# Altium PCB Weather Station v3.PcbDoc
Units mm, origin at the board's own origin, x right, y up, seen from the top; angles counter-clockwise.
Board outline 135.7 x 101 mm, 2 copper layers (Top Layer, Bottom Layer); 49 components, 44 nets, 198 pads, 34 vias.
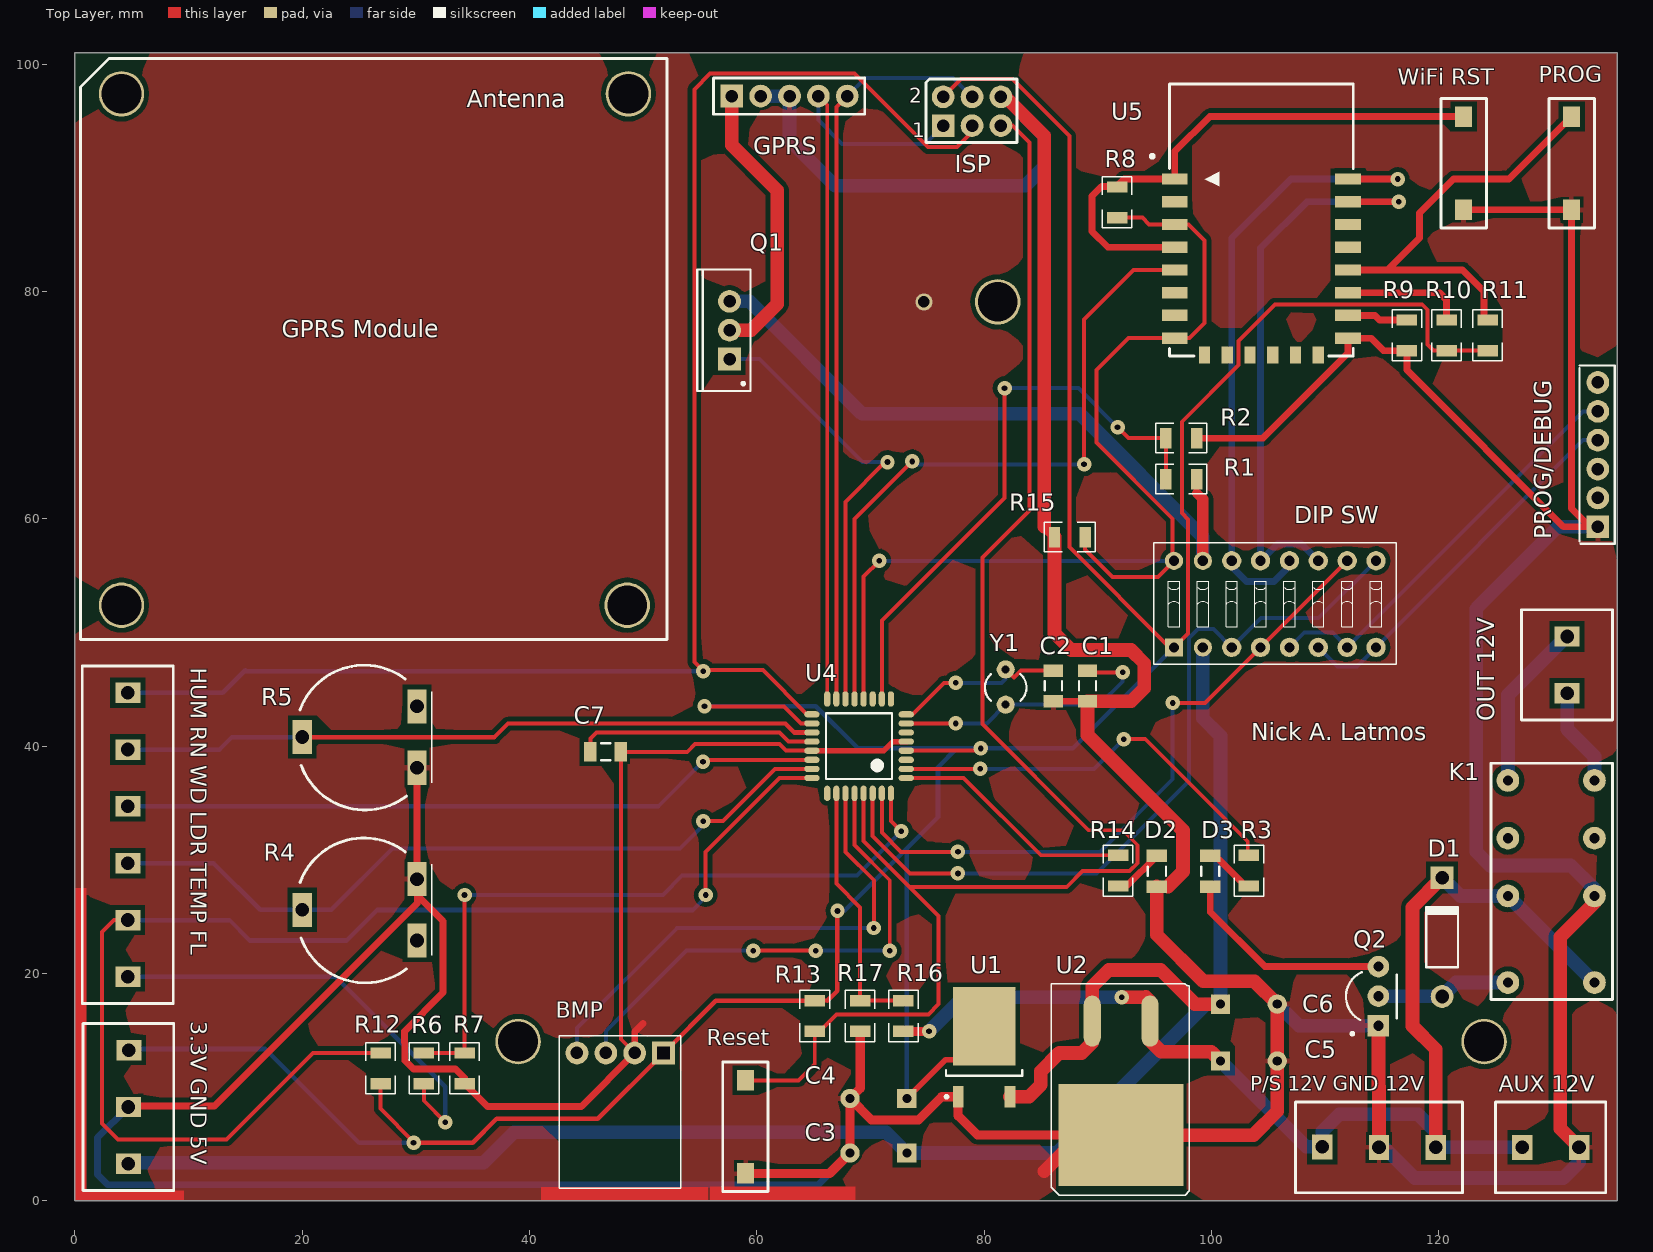
[diagram p0: Top Layer view]
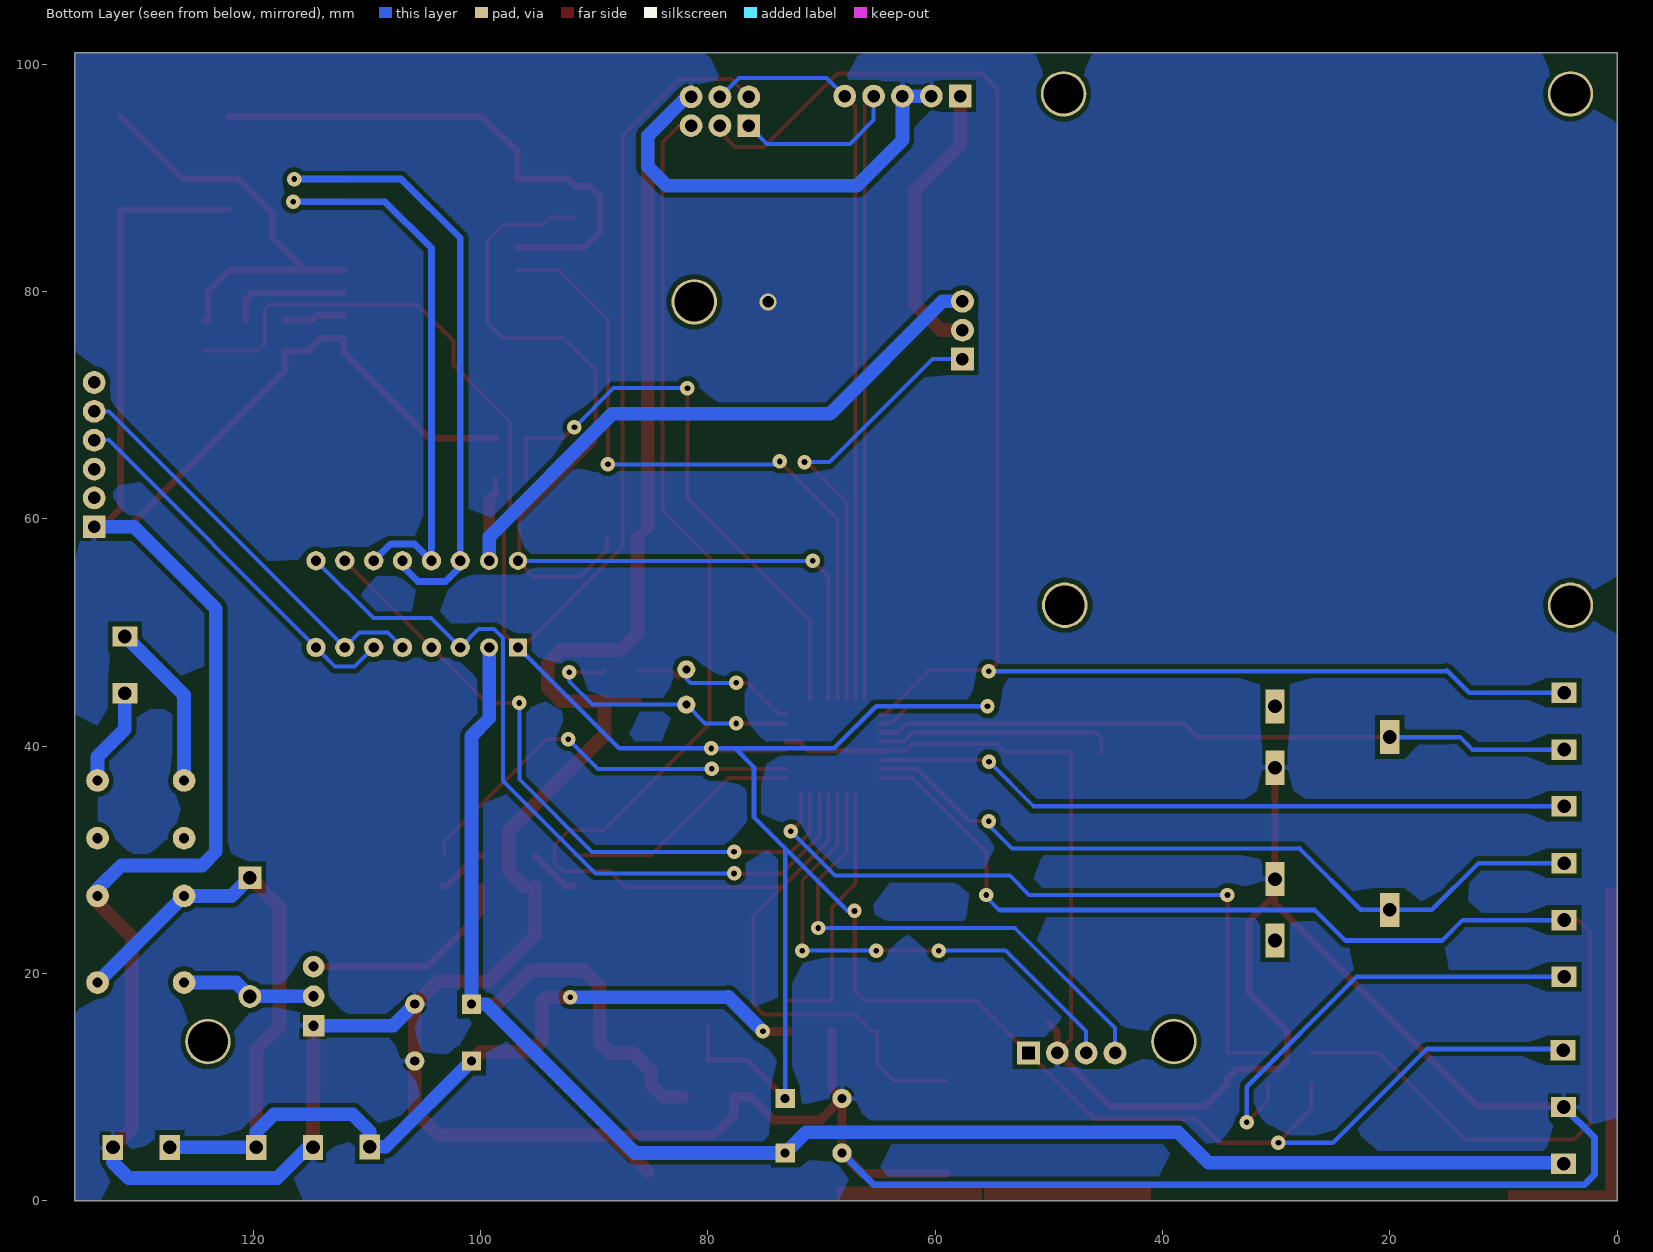
[diagram p1: Bottom Layer view, seen from below]

## Layer stack, top to bottom
Top Solder: solder mask 0.0102, Solder Resist, Dk 3.5
Top Layer: signal copper 0.0356
Dielectric 1: dielectric 0.32, FR-4, Dk 4.8
Bottom Layer: signal copper 0.0356
Bottom Solder: solder mask 0.0102, Solder Resist, Dk 3.5

## Board outline
0,0 0,101 135.7,101 135.7,0 0,0

## Design rules (kind name [scope] priority, off if disabled: settings)
Clearance "Polygon Clearance" [inPolygon] p1: gap=0.43
Clearance "HV to other nets Clearance" [InNetClass('HV')] p2: gap=0.254
Clearance "HV to HV Clearance" [InNetClass('HV') vs InNetClass('HV')] p3: gap=0.4
Clearance [All] p4: gap=0.254
HoleSize [All] p1: absolutevalues=TRUE maxlimit=4 minlimit=0.3 maxpercent=80.000 minpercent=20.000
HoleToHoleClearance [All] p1: gap=0.31 allowstackedmicrovias=TRUE
MinimumSolderMaskSliver [All] p1: minsoldermaskwidth=0.32
PolygonConnect [All] p1: connectstyle=Relief reliefconductorwidth=0.4 reliefentries=4 polygonreliefangle="90 Angle" airgapwidth=0.254
RoutingVias [All] p1: holewidth=0.5 width=1.27 viastyle="Through Hole" minholewidth=0.5 minwidth=1.27 maxholewidth=0.7 maxwidth=1.27
RoutingVias "HV vias" [InNetClass('HV')] p2: holewidth=0.7 width=1.4 viastyle="Through Hole" minholewidth=0.7 minwidth=1.4 maxholewidth=0.9 maxwidth=1.4
SMDNeckDown [All] p1: percent=85.000
SilkToSolderMaskClearance [IsPad] p1: minsilkscreentomaskgap=0.17 clearancetoexposedcopper=FALSE
SolderMaskExpansion [All] p1: expansion=0.102
UnpouredPolygon [All] p1: allowunpoured=FALSE
Width "GND Width" [InNet('GND')] p1: maxlimit=1.2 minlimit=0.35 preferedwidth=0.6
Width "Sensors Width" [InNetClass('Sensors')] p2: maxlimit=0.4 minlimit=0.254 preferedwidth=0.35
Width "Processor Width" [InNetClass('Processor')] p3: maxlimit=0.4 minlimit=0.254 preferedwidth=0.35
Width "LV Width" [InNetClass('LV')] p4: maxlimit=0.7 minlimit=0.4 preferedwidth=0.6
Width "HV Width" [InNetClass('HV')] p5: maxlimit=1.4 minlimit=1 preferedwidth=1.2
Width [All] p6: maxlimit=0.35 minlimit=0.254 preferedwidth=0.35
25 further rules are at their usual default settings.

## Classes and differential pairs
net class Sensors: 3.3V DHT22_DATA DS18B20_DQ FLOW_METER GND LDR_PIN NetP1_6 RAIN_PIN SCL0 SDA0 WIND_SENSOR
net class Processor: 3.3V BATTERY_VOLTAGE CONNECTION_STATUS_LED DHT22_DATA DS18B20_DQ FLOW_METER GND GPRS_CONTROL_PIN GPRS_STATUS LDR_PIN MCU_RX0 MCU_RX1 MCU_TX0 MCU_TX1 NetC1_2 NetC2_1 NetC7_2 NetISP_5 RAIN_PIN ROUTER SCL0 SDA0 VALVE_CONTROL_PIN WIFI_ENABLE WIND_SENSOR
net class LV: 3.3V CONNECTION_STATUS_LED GND GPRS_CONTROL_PIN GPRS_STATUS NetD2_1 NetD3_1 NetD3_2 NetR8_1 NetR9_1 NetR10_1 NetR11_1 ROUTER VALVE_CONTROL_PIN WIFI_ENABLE WIFI_RX WIFI_TX
net class HV: 5V 12V_BAT GND GPRS_ENABLE MOSFET_DRAIN NetD1_1 NetK1_8 NetK1_9

## Components (designator, comment, footprint, x,y, rotation, side; value= is the part's Value field where it differs from the comment)
"3.3V GND 5V" "Clamp x3" "Connector x3 clamps" 8.7,0.9 r90 top (schematic designator "Low Voltage")
"AUX 12V" "AUX 12V" "Connector (Clamp?)" 125,0.7 r0 top
BMP "BMP180" BMP180 53.6,14 r180 top (schematic designator BMP180)
C1 "Cap Semi" C1206 89.1,45.3 r90 top
C2 "Cap Semi" C1206 86.1,45.3 r270 top
C3 "Cap2" CAPR5-4X5 70.7,4.2 r180 top
C4 "Cap2" CAPR5-4X5 70.7,9 r180 top
C5 "Cap2" CAPR5-4X5 103.3,12.3 r0 top
C6 "Cap2" CAPR5-4X5 103.3,17.3 r0 top
C7 "Cap Semi" C1206 46.7,39.5 r180 top
D1 "Diode 1N4004" DO-41 120.3,23.2 r90 top
D2 "LED0" INDC3216 95.2,29 r270 top
D3 "LED0" INDC3216 99.9,29 r270 top
"DIP SW" "418117170908" 418117170908 105.6,52.5 r0 top
GPRS "Header 5" HDR1X5 57.8,97.2 r0 top (schematic designator "SIM Pinout")
"GPRS Module" "SIM900" SIM900 2.1,50.4 r0 top (schematic designator U3)
"HUM RN WD LDR TEMP FL" "Clamp" "Connector Clamp 6" 4.6,30.7 r270 top (schematic designator P1)
ISP "Header 3X2" HDR2X3 76.4,94.6 r0 top
K1 "Relay-DPDT" "Sanyou Relay" 134.9,18.2 r90 top
"OUT 12V" "Homemade Connector" "Connector (Clamp?)" 127.3,52 r270 top
"P/S 12V GND 12V" "Clamp x3" "Connector x3 clamps" 122.1,8.7 r180 top (schematic designator P2)
PROG "SW-PB" "SMD push button 10x4" 131.7,96.3 r180 top (schematic designator S2)
PROG/DEBUG "Header 6" HDR1X6 134,59.3 r90 top (schematic designator FTDI)
Q1 "PMOS-2" TO-220AB 57.6,76.6 r90 top
Q2 "BC639-16ZL1G" ONSC-TO-92-3-29-11_AM_BL 114.7,18 r90 top
R1 "smd resistor 4x2mm" "smd resistor 4x2mm" 99.4,62.4 r90 top
R2 "smd resistor 4x2mm" "smd resistor 4x2mm" 99.4,66 r90 top
R3 "smd resistor 4x2mm" "smd resistor 4x2mm" 102.2,27 r0 top
R4 "RPot" "potentiometer (Piher)" 31,21.6 r90 top
R5 "RPot" "potentiometer (Piher)" 31,36.8 r90 top
R6 "smd resistor 4x2mm" "smd resistor 4x2mm" 29.6,9.6 r0 top
R7 "smd resistor 4x2mm" "smd resistor 4x2mm" 33.2,9.6 r0 top
R8 "smd resistor" "smd resistor 4x2mm" 92.8,89.9 r180 top
R9 "smd resistor 4x2mm" "smd resistor 4x2mm" 118.3,78.2 r180 top
R10 "smd resistor 4x2mm" "smd resistor 4x2mm" 121.8,78.2 r180 top
R11 "smd resistor 4x2mm" "smd resistor 4x2mm" 125.4,78.2 r180 top
R12 "smd resistor 4x2mm" "smd resistor 4x2mm" 28,13.7 r180 top
R13 "smd resistor 4x2mm" "smd resistor 4x2mm" 64,14.2 r0 top
R14 "smd resistor 4x2mm" "smd resistor 4x2mm" 90.7,27 r0 top
R15 "smd resistor 4x2mm" "smd resistor 4x2mm" 89.6,57.3 r90 top
R16 "smd resistor 4x2mm" "smd resistor 4x2mm" 71.8,14.2 r0 top
R17 "smd resistor 4x2mm" "smd resistor 4x2mm" 70.2,18.3 r180 top
Reset "SW-PB" "SMD push button 10x4" 59,11.5 r180 top (schematic designator S3)
U1 "LM1117DT-3.3" TD03B_N 80,13.5 r90 top
U2 "L7805" D2PAK 94.6,15.8 r180 top
U4 "ATmega328P-AU" 32A_L 69,40 r180 top
U5 "ESP_12_E" ESP_12_E 96.4,89.9 r0 top
"WiFi RST" "SW-PB" "SMD push button 10x4" 122.2,86.3 r0 top (schematic designator S1)
Y1 "XTAL" R38 81.9,45.2 r180 top

## Footprints (in the part's own frame and the unit in brackets; to place one, negate y for a bottom-side part, rotate by r counter-clockwise, add the part's x,y. Pads: shape width x height; smd on the part's side, far side on the other; paste and mask are expansions set on the pad)
32A_L [mm] "Thin QFP, 32-Leads, Body 7x7mm, Pitch 0.8mm, IPC High Density"
  oval 1.35x0.546 smd mask+0.15: 1(-4.15,2.8) 2(-4.15,2) 3(-4.15,1.2) 4(-4.15,0.4) 5(-4.15,-0.4) 6(-4.15,-1.2) 7(-4.15,-2) 8(-4.15,-2.8) 17(4.15,-2.8) 18(4.15,-2) 19(4.15,-1.2) 20(4.15,-0.4) 21(4.15,0.4) 22(4.15,1.2) 23(4.15,2) 24(4.15,2.8)
  oval 0.546x1.35 smd mask+0.15: 9(-2.8,-4.15) 10(-2,-4.15) 11(-1.2,-4.15) 12(-0.4,-4.15) 13(0.4,-4.15) 14(1.2,-4.15) 15(2,-4.15) 16(2.8,-4.15) 25(2.8,4.15) 26(2,4.15) 27(1.2,4.15) 28(0.4,4.15) 29(-0.4,4.15) 30(-1.2,4.15) 31(-2,4.15) 32(-2.8,4.15)
  silkscreen extent -2.9,-2.9 2.9,2.9, body extent -3.5,-3.5 3.5,3.5, height 1.2
418117170908 [mm] "08p, 2.54mm Pitch, Horizontal, Box Type, THT, flat Actuator, red, without Tape, Tube"
  rect 1.6x1.6 hole 0.9: 1(-8.89,-3.81)
  round 1.6 hole 0.9: 2(-6.35,-3.81) 15(-6.35,3.81) 16(-8.89,3.81)
  round 1.7 hole 0.9: 3(-3.81,-3.81) 4(-1.27,-3.81) 5(1.27,-3.81) 6(3.81,-3.81) 7(6.35,-3.81) 8(8.89,-3.81) 9(8.89,3.81) 10(6.35,3.81) 11(3.81,3.81) 12(1.27,3.81) 13(-1.27,3.81) 14(-3.81,3.81)
  silkscreen extent -10.66,-5.3 10.66,5.4, body extent -10.66,-4.8 10.66,4.8, height 5.2
BMP180 [mm]
  rect 2x2 hole 1.1 square: 1(1.8,1)
  round 2 hole 1.1: 2(4.34,1) 3(6.88,1) 4(9.42,1)
  silkscreen extent 0.3,-0.5 11,12.9
C1206 [mm] "Chip Capacitor, Body 3.2x1.6mm, IPC High Density"
  rect 1.1x1.7 smd: 1(-1.35,0) 2(1.35,0)
  silkscreen extent -0.4,-0.75 0.4,0.75, body extent -1.7,-0.9 1.7,0.9, height 1.3
CAPR5-4X5 [mm] "Capacitor; 2 Leads"
  rect 1.7x1.7 hole 0.8: 1(-2.5,0)
  round 1.7 hole 0.8: 2(2.5,0)
"Connector (Clamp?)" [mm]
  rect 1.8x2.2 hole 1.2: 1(2.35,4) 2(7.35,4)
  silkscreen extent 0,0 9.7,8
"Connector Clamp 6" [mm]
  rect 1.8x2.2 hole 1.2: 1(-14,0.05) 2(-9,0.05) 3(-4,0.05) 4(1,0.05) 5(6,0.05) 6(11,0.05)
  silkscreen extent -16.35,-3.95 13.35,4.05
"Connector x3 clamps" [mm]
  rect 1.8x2.2 hole 1.2: 1(2.35,4) 2(7.35,4) 3(12.35,3.95)
  silkscreen extent 0,0 14.7,8
D2PAK [mm]
  oval 1.5x4.5 smd: 1(0,0) 3(5.08,0)
  rect 11x9 smd: 2(2.54,10.025)
  silkscreen extent -3.47,-3.3 8.7,15.3, body extent -2.62,0.05 7.59,13.54, height 3.81
DO-41 [mm] "Diode, Axial; Body 5.2 x 2.7 mm (LxDia. max), Lead Dia. 0.86 mm (max)"
  round 2 hole 1.2: 1(-5.23,0)
  rect 2x2 hole 1.2: 2(5.23,0)
  silkscreen extent -2.65,-1.4 2.75,1.4
ESP_12_E [mm] "ESP-12 Wi-Fi Module by AI-Thinker"
  rect 2.25x1 smd: 1(0.375,0) 2(0.375,-2) 3(0.375,-4) 4(0.375,-6) 5(0.375,-8) 6(0.375,-10) 7(0.375,-12) 8(0.375,-14) 15(15.625,-14) 16(15.625,-12) 17(15.625,-10) 18(15.625,-8) 19(15.625,-6) 20(15.625,-4) 21(15.625,-2) 22(15.625,0)
  rect 1x1.5 smd: 9(3,-15.5) 10(5,-15.5) 11(7,-15.5) 12(9,-15.5) 13(11,-15.5) 14(13,-15.5)
  silkscreen extent -1.75,-15.57 16.08,8.37, body extent 0,-15.49 16,8.51, height 2.75
HDR1X5 [mm] "Connector; Header; 5 Position"
  rect 2x2 hole 1.1: 1(0,0)
  round 2 hole 1.1: 2(2.54,0) 3(5.08,0) 4(7.62,0) 5(10.16,0)
HDR1X6 [mm] "Connector; Header; 6 Position"
  rect 2x2 hole 1.1: 1(0,0)
  round 2 hole 1.1: 2(2.54,0) 3(5.08,0) 4(7.62,0) 5(10.16,0) 6(12.7,0)
  silkscreen extent -1.5,-1.5 14.2,1.6
HDR2X3 [mm] "Connector; Header; 3x2 Position"
  rect 2x2 hole 1.1: 1(0,0)
  round 2 hole 1.1: 2(0,2.54) 3(2.54,0) 4(2.54,2.54) 5(5.08,0) 6(5.08,2.54)
INDC3216 [mm] "Chip Inductor, Body 3.2x1.6mm, IPC High Density"
  rect 1.1x1.8 smd: 1(-1.35,0) 2(1.35,0)
  silkscreen extent -0.4,-0.8 0.4,0.8, body extent -1.7,-0.9 1.7,0.9, height 0.55
ONSC-TO-92-3-29-11_AM_BL [mm] "TO, 3-Leads, Body Dia 4.7mm, Pitch 2.6mm"
  rect 1.9x1.9 hole 0.9: 1(-2.6,0)
  round 1.9 hole 0.9: 2(0,0) 3(2.6,0)
  silkscreen extent -3.42,-1.6 2.12,2.85, body extent -2.84,-1.34 2.84,2.36, height 8.92
"potentiometer (Piher)" [mm]
  rect 3x1.7 hole 1.2: 1(1.3,0.9) 2(6.7,0.9) 3(4,11)
  silkscreen extent -2.42,-0.4 10.32,11.19
R38 [mm] "Crystal, Thru-Hole; 2 Leads; Body 3.1 x 8.2 mm (Dia.xH)"
  round 1.6 hole 0.7: 1(0,1.55) 2(0,-1.55)
  silkscreen extent -1.83,-1.14 1.83,1.2
"Sanyou Relay" [mm] "Sanyou Relay"
  round 2 hole 0.9: 1(1,8.81) 4(8.62,8.81) 6(13.7,8.81) 8(18.78,8.81) 9(18.78,1.19) 11(13.7,1.19) 13(8.62,1.19) 16(1,1.19)
  silkscreen extent -0.5,-0.4 20.3,10.3
SIM900 [mm]
  round 4 hole 3.5: 6(2,47) 7(46.6,47) 8(46.5,2) 9(2,2)
  silkscreen extent -1.6,-1 50,50.1
"SMD push button 10x4" [mm]
  rect 1.5x1.8 smd: 1(0,0.9) 2(0,9.1)
  silkscreen extent -2,-0.7 2,10.7
"smd resistor 4x2mm" [mm]
  rect 1.8x1 smd: 1(1.1,0.7) 2(1.1,3.4)
  silkscreen extent -0.2,-0.2 2.4,4.3
TD03B_N [mm] "D-PAK, 4-Leads, Body 6.1x6.6mm, Pitch 2.29mm, Lead Span 9.7mm, IPC Medium Density"
  rect 1.9x0.95 smd: 1(-4.35,2.28) 3(-4.35,-2.28)
  rect 6.9x5.5 smd: 4(1.85,0)
  silkscreen extent -4.47,-3.35 -2,3.43, body extent -2.5,-3.35 3.7,3.35, height 2.38
TO-220AB [mm] "TO, Thru-Hole, Vertical, Heatsink Mounted; 3 In-Line Leads; Pitch 2.54 mm"
  rect 2x2 hole 1.1: 1(-2.54,0)
  round 2 hole 1.1: 2(0,0) 3(2.54,0)
  silkscreen extent -5.35,-1.85 5.35,2.85, body extent -5.4,-1.9 5.4,2.9, height 19.3

## Part data
"AUX 12V" "OUT 12V": library part "Header 2", "Klema"
C1 C2 C7: "Capacitor (Semiconductor SIM Model)"
C3 C4 C5 C6: "Capacitor"
D1: "1 Amp General Purpose Rectifier"
D2 D3: "SMD led"
"DIP SW": "2.54 mm Compact THT Dip Switch with Flat Actuator WS-DITV"
GPRS: "Header, 5-Pin"
"HUM RN WD LDR TEMP FL": library part "Header 6", "Header, 6-Pin"
ISP: "Header, 3-Pin, Dual row"
K1: "Dual-Pole Dual-Throw Relay"
PROG Reset "WiFi RST": "Switch"
PROG/DEBUG: "Header, 6-Pin"
Q1: "P-Channel Power MOSFET"
Q2: "High Current Transistor, NPN Silicon, 3-Pin TO-92, Pb-Free, Ammo Box"
R1 R2 R3 R6 R7 R8 R9 R10 R11 R12 R13 R14 R15 R16 R17: library part Res3
R4 R5: "Potentiometer"
U1: "800mA Low-Dropout Linear Regulator, 3-pin TO-252"
U2: library part L7805-D2PAK, "LINEAR REGULATOR 5.0V"
U4: "8-bit AVR Microcontroller, 32KB Flash, 1KB EEPROM, 2KB SRAM, 32-pin TQFP, Industrial Grade (-40°C to 85°C)"
U5: "ESP-12 Wi-Fi Module by AI-Thinker"
Y1: "Crystal Oscillator"

## Free pads (board coordinates)
  round 4 hole 3.5: 0(39,14) 0(81.2,79.1) 0(124,14)

## Via types
v1: diameter 1.27, hole 0.5, Top Layer to Bottom Layer, 33 vias
v2: diameter 1.5, hole 1, Top Layer to Bottom Layer, 1 vias

## Nets (pads, with @x,y where several pads share a name; then routed paths per layer and width w, separated by ;. In a path a pad name is that pad's centre, name@x,y a point inside that pad or via, vN(x,y) a via of type N, cw(c..) or ccw(c..) an arc to the next point about the centre after c; other vN are vias at no path point)
3.3V: "3.3V GND 5V.3" "DIP SW.1" BMP.1 C4.1 ISP.2 R10.2 R11.2 R12.2 R13.2 U1.4 U4.4 U4.18 | length 323.3
  Top Layer w0.35: R12.2 26.9,8.1 v1@29.9,5.1 ; v1(55.4,43.5) 62.4,43.5 63.9,42 U4.18 ; R13.2 66.216,17.6 ; U4.4 79.5,39.6 v1(79.7,39.8) ; ISP.2 77.96,98.7 82.481,98.7 87.5,93.681 87.5,57.512 96.322,48.69 96.71,48.69 97.941,49.921 97.941,59.959 97.4,60.5 97.4,68.543 102.4,73.543 102.4,75.66 105.586,78.846 118.554,78.846 119,78.4 119,75.338 119.538,74.8 R10.2 R11.2 ; U1.4@80,12.4 U1.4
  Top Layer w0.4: v1@29.9,5.1 35,5.1 37.1,7.2 46,7.2 BMP.1 56.4,17.6 R13.2 ; 66.216,17.6 67.1,18.484 v1(67.1,25.5)
  Top Layer w0.5: C4.1 76.6,12.4 U1.4@80,12.4
  Bottom Layer w0.35: v1(67.1,25.5) v1@67.708,25.5 ; 73.2,30.981 75.946,33.727
  Bottom Layer w0.4: 4.75,13.25 4.85,13.35 16.75,13.35 25,5.1 v1(29.8,5.1) ; v1(55.4,43.5) 65.2,43.5 68.9,39.8 77.6,39.8 ; v1@67.708,25.5 75.944,33.736 ; C4.1 73.2,30.981 ; 75.946,33.727 75.946,38.146 77.6,39.8 ; 96.71,48.69 87.82,39.8 v1(79.7,39.8) 77.6,39.8
5V: "3.3V GND 5V.1" "DIP SW.2" C3.1 C6.1 U1.3 U2.3 | length 163.4
  Top Layer w1.2: U1.3 83.95,9.15 85,10.2 85,11.4 86.6,13 88.6,13 89.52,13.92 89.52,18.857 90.963,20.3 95.55,20.3 98.55,17.3 C6.1
  Bottom Layer w1.2: 4.7,3.25 4.8,3.35 35.957,3.35 38.632,6.025 71.375,6.025 C3.1 86.415,4.2 99.515,17.3 C6.1 100.8,40.9 99.25,42.45 99.25,48.69
12V_BAT: "AUX 12V.1" "P/S 12V GND 12V.1" "P/S 12V GND 12V.3" C5.1 D1.2 K1.4 K1.16 R16.1 U2.1 | length 110.1
  Top Layer w0.8: R16.1 v1(75.157,14.9)
  Top Layer w1.2: v1(92.1,17.9) 94.182,17.9 94.219,17.937 94.6,17.556 94.6,14.1 95.6,13.1 100,13.1 C5.1 ; 119.75,4.7 119.75,13.324 117.7,15.374 117.7,25.83 D1.2
  Bottom Layer w1.2: v1(75.157,14.9) 78.194,17.937 78.231,17.9 v1(92.1,17.9) ; C5.1 108.35,4.75 109.75,4.75 109.75,6.099 111.251,7.6 118.209,7.6 119.75,6.059 119.75,4.7 121.258,4.7 127.35,4.7 ; D1.2 121.91,26.82 K1.4 K1.16
BATTERY_VOLTAGE: R16.2 R17.1 U4.26 | length 22.9
  Top Layer w0.35: U4.26 67,27.9 69.086,25.814 69.086,17.6 R17.1 70.991,17.6 ; 70.991,17.6 R16.2
CONNECTION_STATUS_LED: R14.2 U4.1 | length 21.5
  Top Layer w0.35: U4.1 78.2,37.2 85,30.4 R14.2
DHT22_DATA: "HUM RN WD LDR TEMP FL.1" ISP.3 U4.17 | length 143.1
  Top Layer w0.35: U4.17 64.438,42.8 60.549,46.689 55.389,46.689 v1(55.3,46.6) 54.5,47.4 54.5,97.8 55.9,99.2 68.6,99.2 75.085,92.715 77.615,92.715 78.94,94.04 ISP.3
  Bottom Layer w0.35: 14.989,46.689 15.077,46.6
  Bottom Layer w0.4: 4.65,44.7 13,44.7 14.989,46.689 ; 15.077,46.6 v1(55.3,46.6)
DS18B20_DQ: "HUM RN WD LDR TEMP FL.5" R12.1 U4.24 | length 117
  Top Layer w0.35: 4.65,24.7 3.45,24.7 2.4,23.65 2.4,6.8 3.804,5.396 13.356,5.396 20.96,13 R12.1 ; v1(55.5,26.9) 55.5,30.7 62,37.2 U4.24
  Bottom Layer w0.35: 54.38,25.583 55.5,26.703 v1(55.5,26.9)
  Bottom Layer w0.4: 4.65,24.7 13.6,24.7 15.4,22.9 23.909,22.9 26.592,25.583 54.38,25.583
FLOW_METER: R6.2 R7.2 U4.32 | length 62
  Top Layer w0.35: R6.2 R7.2@34.288,13 ; v1(34.288,26.903) R7.2@34.288,13 ; R7.2 R7.2@34.288,13 ; U4.32 71.8,33.4 v1(72.7,32.5)
  Bottom Layer w0.35: v1(34.288,26.903) 51.738,26.903 53.435,28.6 68.8,28.6 v1(72.7,32.5)
FTDI_RX: "DIP SW.5" "DIP SW.7" PROG/DEBUG.5 | length 36.8
  Bottom Layer w0.35: 106.87,48.69 108.172,49.992 110.648,49.992 111.95,48.69 132.72,69.46 PROG/DEBUG.5
FTDI_TX: "DIP SW.6" "DIP SW.8" PROG/DEBUG.4 | length 33.5
  Bottom Layer w0.35: 109.41,48.69 111.1,47 112.8,47 114.49,48.69 132.72,66.92 PROG/DEBUG.4
GND: "3.3V GND 5V.2" "AUX 12V.2" "P/S 12V GND 12V.2" "WiFi RST.1" BMP.2 C1.1 C2.2 C3.2 C4.2 C5.2 C6.2 C7.1 D2.2 GPRS.2 GPRS.3 ISP.6 K1.13 PROG.2 PROG/DEBUG.1 Q2.1 R2.1 R4.2 R5.1 R7.1 R9.2 R15.2 R17.2 Reset.2 U1.1 U2.2 U4.5 U4.21 U5.15 | length 642.5
  Top Layer w0.35: BMP.2 48.05,14.21 C7.1 53.88,39.5 54.567,40.187 61.997,40.187 62.571,39.613 U4.21@64.437,39.613
  Top Layer w0.467: U4.21@64.437,39.613 64.45,39.6 U4.21 71.182,39.6 71.982,40.4 U4.5
  Top Layer w0.6: 4.7,8.25 4.8,8.35 12.283,8.35 30.1,26.167 30.125,26.167 R4.2@30.117,26.883 ; R5.1 R4.2 30.1,26.9 R4.2@30.117,26.883 ; 50,15.6 49.26,14.86 BMP.2 44.56,8.3 36.3,8.3 R7.1 34.3,10.8 33.5,11.6 29.78,11.6 29.029,12.351 29.029,13.915 29,13.944 29,14.91 32.4,18.31 32.4,24.6 R4.2@30.117,26.883 ; C2.2 C1.1 C1.1@89.101,43.95 ; D2.2 96.188,27.65 ; R2.1 104.533,67.1 112.025,74.592 U5.15 114.044,75.9 115.144,74.8 R9.2 117.2,73.1 131,59.3 PROG/DEBUG.1@133.3,59.3 ; 114.7,10.062 114.75,10.012 ; 122.2,87.2 PROG.2 131.7,61 ; 131.7,60.9 PROG/DEBUG.1@133.3,59.3 ; PROG/DEBUG.1 PROG/DEBUG.1@133.3,59.3
  Top Layer w0.8: Reset.2 66.4,2.4 C3.2 C4.2 ; R17.2 69.1,9.9 C4.2 ; U2.2 79.425,5.775 77.72,7.48 U1.1 76.276,9.15 74.226,7.1 70.1,7.1 C4.2
  Top Layer w0.84: 85.3,59.3 R15.2
  Top Layer w1.2: ISP.6 81.86,97.14 85.3,93.7 85.3,59.3 ; 85.3,2.6 88.475,5.775 U2.2 103.706,5.775 105.8,7.869 C5.2 C6.2 103.8,19.3 99.3,19.3 95.2,23.4 D2.2 ; R15.2 86.2,49.941 87.679,48.462 92.938,48.462 94.1,47.3 94.1,45.1 92.95,43.95 89.101,43.95 89.101,40.984 97.5,32.585 97.5,28.962 96.188,27.65 ; 114.7,10.062 Q2.1 ; 114.75,4.7 114.75,10.012 ; 132.35,4.7 130.7,6.35 130.7,23.21 133.71,26.22 K1.13
  Bottom Layer w0.6: 4.7,8.25 2,5.55 2,2.3 2.9,1.4 65.4,1.4 C3.2 ; 114.75,4.7 115.2,4.7 ; 132.35,3.375 132.35,4.7
  Bottom Layer w1.2: GPRS.2 GPRS.3 62.88,93.32 66.9,89.3 83.6,89.3 85.3,91 85.3,93.7 81.86,97.14 ISP.6 ; C6.2 107.7,15.4 Q2.1 ; 115.2,4.7 117.9,2 130.975,2 132.35,3.375 ; K1.13 133.71,27.42 131.63,29.5 124.5,29.5 123.3,30.7 123.3,52.1 130.5,59.3 PROG/DEBUG.1
  other v2: 74.7,79.1
GPRS_CONTROL_PIN: Q1.1 U4.14 | length 40.2
  Top Layer w0.35: U4.14 67.8,61.5 71.3,65 v1(71.5,65)
  Bottom Layer w0.35: Q1.1 60.24,74.06 69.3,65 v1(71.5,65)
GPRS_ENABLE: "DIP SW.15" Q1.3 R1.1 | length 59.8
  Top Layer w0.5: 98.7,62.26 R1.1
  Top Layer w0.85: 98.7,62.26 99.25,61.71
  Top Layer w1: 99.25,56.31 99.25,61.71
  Bottom Layer w1.2: Q1.3 59.36,79.14 69.265,69.235 88.43,69.235 99.25,58.415 99.25,56.31
GPRS_STATUS: R1.2 R2.2 U4.10 | length 51.4
  Top Layer w0.35: U4.10 71,51.052 81.8,61.852 v1(81.8,71.5) ; v1(91.743,68.051) 92.694,67.1 R2.2 96,65.283 R1.2
  Bottom Layer w0.35: v1(81.8,71.5) 88.294,71.5 v1(91.743,68.051)
LDR_PIN: "HUM RN WD LDR TEMP FL.4" R4.3 U4.23 | length 67.2
  Top Layer w0.35: v1(55.3,33.4) 57.019,33.4 61.619,38 U4.23
  Bottom Layer w0.35: 27.945,31 53.233,31 55.3,33.067 v1(55.3,33.4)
  Bottom Layer w0.4: 4.65,29.7 12.2,29.7 16.3,25.6 R4.3 22.545,25.6 27.945,31
MCU_RX0: "DIP SW.3" "DIP SW.9" U4.30 | length 69.5
  Top Layer w0.35: U4.30 70.2,32.1 73.5,28.8 v1(77.7,28.8)
  Bottom Layer w0.35: v1(77.7,28.8) 89.9,28.8 98.017,36.917 98.017,49.509 98.807,50.3 100.18,50.3 101.79,48.69 104.362,51.262 109.442,51.262 114.49,56.31
MCU_RX1: GPRS.4 ISP.1 U4.16 | length 68
  Top Layer w0.35: GPRS.4 66.2,96.42 U4.16
  Bottom Layer w0.35: GPRS.4 65.42,95.08 67.5,93 74.8,93 ISP.1
MCU_TX0: "DIP SW.4" "DIP SW.10" U4.31 | length 59.6
  Top Layer w0.35: U4.31 71,32.4 72.7,30.7 v1(77.7,30.7) ; v1(96.6,43.8) 99.44,43.8 104.33,48.69 111.95,56.31
  Bottom Layer w0.35: v1(77.7,30.7) 90.2,30.7 96.6,37.1 v1(96.6,43.8)
MCU_TX1: GPRS.5 ISP.4 U4.15 | length 65.8
  Top Layer w0.35: U4.15 67,96.24 GPRS.5
  Bottom Layer w0.35: GPRS.5 69.56,98.8 77.28,98.8 ISP.4
MOSFET_DRAIN: GPRS.1 Q1.2 | length 25.1
  Top Layer w1.2: Q1.2 59.5,76.6 61.8,78.9 61.8,88.9 57.8,92.9 GPRS.1
NetC1_2: C1.2 U4.7 Y1.1 | length 24.5
  Top Layer w0.35: U4.7 v1(77.5,42) ; C1.2 89.25,46.5 v1(92.2,46.5)
  Bottom Layer w0.35: v1(77.5,42) 80.25,42 Y1.1 90.15,43.65 92.2,45.7 v1(92.2,46.5)
NetC2_1: C2.1 U4.8 Y1.2 | length 15.6
  Top Layer w0.35: U4.8 73.684,42.8 76.456,45.572 v1(77.5,45.572) ; Y1.2 82.629,46.021 83.258,46.65 C2.1
  Bottom Layer w0.35: v1(77.5,45.572) 81.544,45.572 81.9,45.928 Y1.2
NetC7_2: C7.2 U4.20 | length 21.2
  Top Layer w0.35: C7.2 45.35,40.658 45.896,41.204 61.996,41.204 62.8,40.4 U4.20
NetD1_1: D1.1 K1.1 Q2.2 | length 11.9
  Bottom Layer w1.2: Q2.2 119.115,18 D1.1 121.53,19.2 K1.1
NetD2_1: D2.1 R14.1 | length 4.5
  Top Layer w0.6: R14.1 92.55,27.7 D2.1
NetD3_1: D3.1 R3.1 | length 4.5
  Top Layer w0.6: D3.1 100.35,30.35 103,27.7 R3.1
NetD3_2: D3.2 Q2.3 | length 19
  Top Layer w0.6: D3.2 99.9,25.4 104.7,20.6 Q2.3
NetISP_5: ISP.5 R13.1 Reset.1 U4.29 | length 139.3
  Top Layer w0.35: Reset.1 63.676,10.6 65.1,12.024 R13.1 65.505,14.9 67.005,16.4 75.1,16.4 76,17.3 76,25.059 73.445,27.615 ; U4.29 69.4,31.659 73.445,27.615 ; ISP.5 82.5,94.6 84,93.1 84,60.74 79.856,56.596 79.856,41.94 89.196,32.6 92.2,32.6 93.52,31.28 93.52,29.72 92.8,29 88.658,29 87.273,27.615 73.445,27.615
NetK1_8: "OUT 12V.1" K1.8 | length 14.5
  Bottom Layer w1.2: K1.8@126.3,37.37 126.1,37.57 126.1,44.5 131.25,49.65 131.3,49.65
NetK1_9: "OUT 12V.2" K1.9 | length 8.7
  Bottom Layer w1.2: 131.3,44.65 131.3,41.5 133.71,39.09 K1.9
NetP1_6: "HUM RN WD LDR TEMP FL.6" R6.1 | length 39.3
  Top Layer w0.35: R6.1 30.7,8.8 v1(32.6,6.9)
  Bottom Layer w0.4: 4.65,19.7 22.924,19.7 32.6,10.024 v1(32.6,6.9)
NetR8_1: "WiFi RST.2" R8.1 U5.1 U5.4 | length 48
  Top Layer w0.6: U5.4 90.9,83.9 89.5,85.3 89.5,88.4 90.347,89.247 91.653,89.247 92.306,89.9 U5.1 96.775,92.311 99.864,95.4 122.2,95.4
NetR9_1: R9.1 U5.16 | length 5.3
  Top Layer w0.6: U5.16 114.4,77.9 114.8,77.5 R9.1
NetR10_1: R10.1 U5.17 | length 10.7
  Top Layer w0.6: U5.17 120.064,79.9 120.699,79.265 R10.1
NetR11_1: PROG.1 R11.1 U5.18 | length 38.6
  Top Layer w0.6: U5.18 115.5,81.9 ; R11.1 124,77.5 124,80 122.1,81.9 115.5,81.9 ; PROG.1 126.2,89.9 121.3,89.9 118.3,86.9 118.3,84.7 115.5,81.9
RAIN_PIN: "HUM RN WD LDR TEMP FL.2" R5.3 U4.19 | length 61.5
  Top Layer w0.35: 36.907,40.8 38.098,41.991 62.509,41.991
  Top Layer w0.4: R5.3 36.907,40.8 ; 62.509,41.991 63.3,41.2 U4.19
  Bottom Layer w0.35: 12.724,39.7 13.824,40.8
  Bottom Layer w0.4: 4.65,39.7 12.724,39.7 ; 13.824,40.8 R5.3
ROUTER: U4.13 U5.5 | length 60.8
  Top Layer w0.35: U4.13 68.6,59.985 v1(73.669,65.054) ; v1(88.8,64.8) 88.8,77.56 93.14,81.9 U5.5
  Bottom Layer w0.35: v1(73.669,65.054) 73.924,64.8 v1(88.8,64.8)
SCL0: BMP.3 U4.28 | length 45
  Top Layer w0.35: v1(59.7,22) v1(65.2,22) ; U4.28 68.6,31.3 71.7,28.2 v1(71.7,22)
  Bottom Layer w0.35: BMP.3 46.72,14.92 53.8,22 v1(59.7,22) ; v1(65.2,22) v1(71.7,22)
SDA0: BMP.4 U4.27 | length 44.8
  Top Layer w0.35: U4.27 67.8,30.7 70.3,28.2 v1(70.3,24)
  Bottom Layer w0.35: BMP.4 44.18,15.18 53,24 v1(70.3,24)
VALVE_CONTROL_PIN: R3.2 U4.2 | length 36.1
  Top Layer w0.35: U4.2 v1(79.653,38) ; v1(92.302,40.619) 94.181,40.619 103.2,31.6 R3.2@103.2,30.4
  Bottom Layer w0.35: v1(79.653,38) 89.682,38 v1(92.302,40.619)
WIFI_ENABLE: "DIP SW.16" R8.2 R15.1 U4.12 U5.3 U5.8 | length 95.8
  Top Layer w0.35: U4.12 69.4,54.927 v1(70.783,56.31) ; R15.1 88.9,57.3 91.3,54.9 95.3,54.9 96.71,56.31 96.6,56.42 96.6,60 89.9,66.7 89.9,73.1 92.7,75.9 U5.8 98.068,75.9 99.4,77.232 99.4,84.499 97.999,85.9 U5.3 94.527,85.9 93.927,86.5 R8.2
  Bottom Layer w0.35: v1(70.783,56.31) 96.71,56.31
WIFI_RX: "DIP SW.11" "DIP SW.13" U5.21 | length 52.2
  Top Layer w0.6: U5.21 v1(116.5,87.9)
  Bottom Layer w0.6: 109.41,56.31 107.93,57.79 105.81,57.79 104.33,56.31 104.33,83.83 108.4,87.9 v1(116.5,87.9)
WIFI_TX: "DIP SW.12" "DIP SW.14" U5.22 | length 56.7
  Top Layer w0.6: U5.22 v1(116.4,89.9)
  Bottom Layer w0.6: 106.87,56.31 106.87,55.87 105.5,54.5 103.1,54.5 101.79,55.81 101.79,56.31 101.79,84.69 107,89.9 v1(116.4,89.9)
WIND_SENSOR: "HUM RN WD LDR TEMP FL.3" U4.22 | length 61.9
  Top Layer w0.35: v1(55.269,38.638) 55.43,38.8 U4.22
  Bottom Layer w0.35: 51.33,34.7 v1(55.269,38.638)
  Bottom Layer w0.4: 4.65,34.7 51.33,34.7
pads on no net: "GPRS Module.6" "GPRS Module.7" "GPRS Module.8" "GPRS Module.9" K1.6 K1.11 PROG/DEBUG.2 PROG/DEBUG.3 PROG/DEBUG.6 R4.1 R5.2 U4.3 U4.6 U4.9 U4.11 U4.25 U5.2 U5.6 U5.7 U5.9 U5.10 U5.11 U5.12 U5.13 U5.14 U5.19 U5.20

## Polygon pours and split planes (outlines as drawn)
GND on Top Layer "Top Layer Polygon Pour" (solid, pour order 4): 0,101 0,0 135.7,0 135.7,101 0,101
GND on Bottom Layer "Bottom Layer Polygon Pour" (solid, pour order 6): 0,101 0,0 135.7,0 135.7,101 0,101

## Other copper
Top Layer:
  rectangle net GND: 0,26.5 1,27.53
  rectangle net GND: 0,0 1,26.5
  rectangle net GND: 1,0 9.6,0.9
  rectangle net GND: 41.014,0 55.7,1.2
  rectangle net GND: 55.9,0 68.7,1.246
  pour cut-out: 133.7,24.741 132.354,23.395 132.354,22.383 133.612,21.125 134.829,21.125 135.7,21.996 135.7,23.912 134.528,23.912
  pour cut-out: 72.289,96.384 72.636,96.731 74.677,96.731 74.677,97.277 76.2,98.8 75.8,99.2 75.8,100.376 75.176,101 70.501,101 70.501,99.828 69.672,99
  pour cut-out: 67.908,42.982 69.582,42.982 69.638,43.039 70.885,41.792 70.885,41.158 69.997,40.269 68.477,40.269 68.477,40.483 67.398,41.562 67.908,42.073
  pour cut-out: 96.334,46.904 96.93,47.5 99.1,47.5 99.1,46.575 99.543,46.132 98.844,45.434 98.844,44.905 97.753,44.905 97.624,44.776 96.334,46.065
  pour cut-out: 3.22,14.58 3.22,15.161 2.217,16.164 2.7,16.648 2.7,17.95 3.15,18.4 4.4,18.4 4.4,14.7 4.52,14.58
  pour cut-out: 36.96,9.198 42.819,9.198 42.98,9.036 43.521,9.576 43.521,11.322 42.342,12.5 40.69,12.5 39.795,11.605 37.394,11.605 37.071,11.929 36.745,11.603 36.745,9.412
  pour cut-out: 69.937,10.322 73.552,10.322 75.138,11.908 75.138,13.381 74.519,14 71.547,14 71.047,13.5 70.5,13.5 69.937,12.937
  pour cut-out: 80.13,7.285 81.308,8.462 81.14,8.63 81.14,9.906 80.895,9.906 80.755,10.046 80.235,9.526 79.325,9.526 78.557,8.758 78.557,7.843 79.115,7.285
  pour cut-out: 89.598,12.529 89.598,12.577 90.7,13.679 90.7,14.1 90.9,14.1 91.934,15.134 92.612,15.134 93.569,14.177 93.569,13.662 94.702,12.529 94.4,12.227 94.4,10.79 94.11,10.5 92.289,10.5 92.26,10.529 90.357,10.529 89.792,11.094 89.792,12.335
  pour cut-out: 90.117,79.749 90.706,80.338 90.706,82.256 90.306,82.656 89.356,82.656 88.382,81.682 88.117,81.682 88.117,80.578 88.945,79.749
  pour cut-out: 93.201,81.088 94.864,81.088 95.22,80.732 95.22,76.97 94.796,76.546 92.628,76.546 92.574,76.492 92.365,76.7 90.93,76.7 90.25,77.38 90.25,78.137 93.136,81.023
  pour cut-out: 113.855,87.066 115.347,87.066 116.824,85.589 116.824,84.395 116.708,84.395 115.387,83.074 114.895,83.566 113.58,83.566 113.58,86.791
  pour cut-out: 102.922,73.193 106.794,73.193 107.612,72.376 107.612,71.22 104.228,67.836 100.815,67.836 100.815,68.459 99.718,69.556 99.828,69.666 99.828,70.099
  pour cut-out: 92.956,75.283 94.999,75.283 94.999,75.226 95.255,74.97 98.33,74.97 98.33,73.77 99.204,72.896 99.204,71.204 96.824,68.824 94.524,68.824 93.737,68.037 93.149,68.037 92.397,68.79 92.397,68.892 92.218,68.892 90.69,70.42 90.69,71.047 90.5,71.237 90.5,72.828
  pour cut-out: 96.963,25.575 98.712,25.575 101.171,23.116 101.171,21.708 100.289,20.826 99.244,20.826 96.874,23.195 96.963,23.283 96.963,25.575 96.985,25.575 97.164,25.753
  pour cut-out: 94.61,53.954 94.712,54.056 96.144,54.056 97.324,52.876 97.324,51.389 96.152,51.389 95.324,50.56 93.852,52.032 93.852,53.352 94.6,54.1 94.7,54
  pour cut-out: 98.692,53.558 98.692,53.96 99.795,55.063 102.504,55.063 102.594,55.153 102.728,55.019 105.019,55.019 105.397,55.397 106.019,55.397 106.496,54.92 107.081,54.92 107.081,54.913 107.992,54.002 107.992,53.225 107.925,53.225 105.3,50.6 104.693,50.6 103.993,49.9 99.281,49.9 98.557,50.623 98.557,53.423
  pour cut-out: 42.6,1 53.4,1 53.4,11.4 53.23,11.57 51.209,11.57 46.239,6.6 42.6,6.6
Bottom Layer:
  pour cut-out: 133.7,21 134.696,21.996 135.7,21.996 135.7,24.245 134.589,25.356 133.385,25.356 131.394,27.347 131.394,28.155 129.339,28.155 129.032,28.461 128.233,27.662 128.233,26.146 133.498,20.882
  pour cut-out: 71.155,66.116 70.753,66.517 70.753,67.085 71.865,68.196 86.783,68.196 86.783,67.988 87.354,67.417 86.429,66.491 86.429,65.591 74.938,65.591 74.763,65.417 74.145,66.035 71.361,66.035 71.343,66.053
  pour cut-out: 73.303,98.131 73.303,98.069 74.97,96.402 74.97,94.164 74.544,93.738 74.544,93.617 71.717,93.617 71.7,93.6 69.442,93.6 68.681,94.361 68.681,96.479 70.333,98.131
  pour cut-out: 70.399,92.383 74.989,92.383 75.695,93.09 82.01,93.09 82.4,92.7 82.8,92.7 82.8,91.816 83.154,91.462 82.145,90.453 82.145,90.383 69.268,90.383 70.399,91.514

## Silkscreen, mask and mechanical layers (free items; w line width, h text height)
Top Overlay:
  lines w0.254: 56.2,95.6 69.5,95.6 69.5,98.8 56.2,98.8 56.2,95.6 ; 74.9,93.1 82.9,93.1 82.9,98.7 75.2,98.7 74.9,98.4 74.9,93.1
  text "Nick A. Latmos" at 103.5,40.5 h1.52

## Text inside footprints (layer, text, board x,y; h text height)
"GPRS Module": Top Overlay "Antenna" at 34.5,96.2 h1.52
ISP: Top Overlay "2" at 73.4,96.6 h1.27; Top Overlay "1" at 73.7,93.6 h1.27
U5: Mechanical 13 "CUTOUT POLYGON" at 96.527,97.266 h0.25; Mechanical 13 "ANTENNA AREA" at 96.527,97.774 h0.25